# EAGLE board bateria (EAGLE 9.6.2)
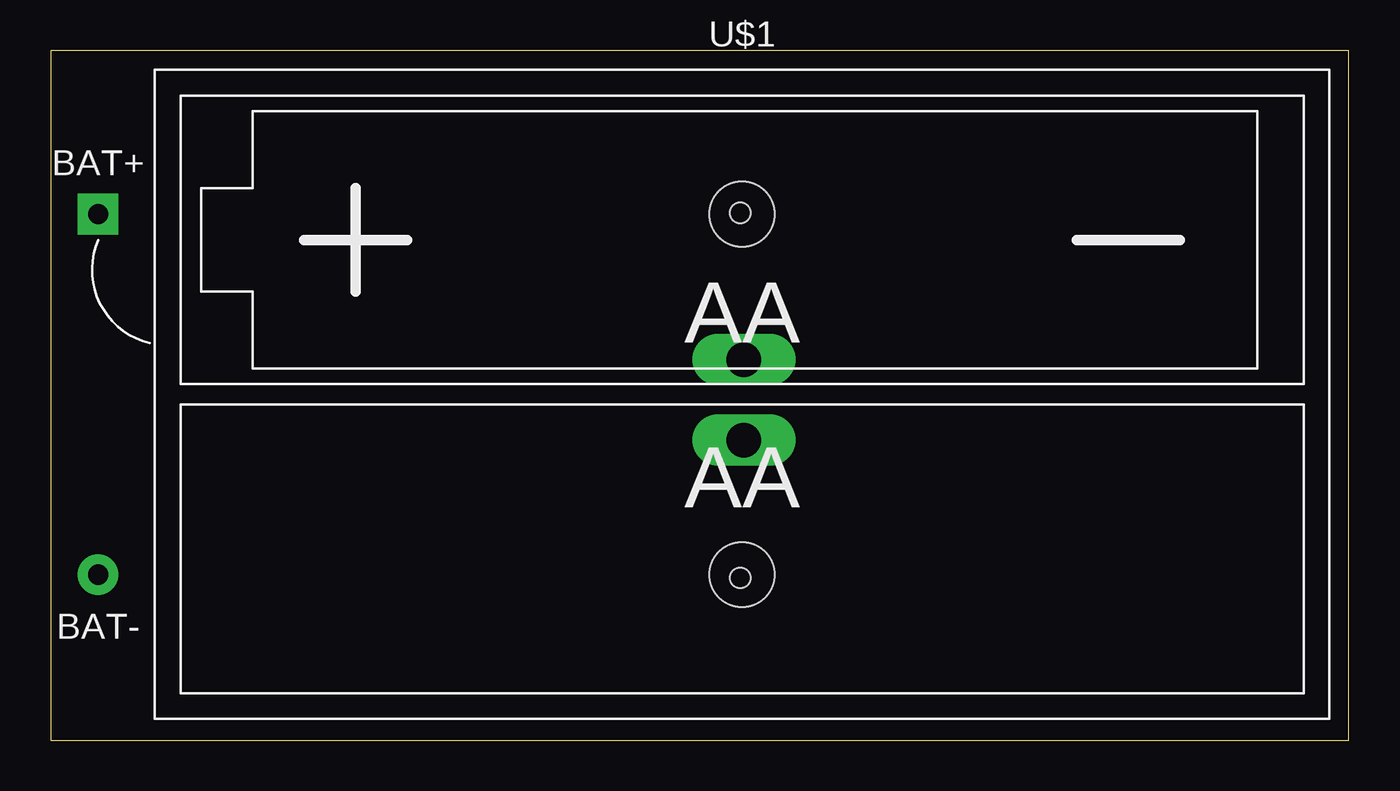
[diagram p0: board, top side]
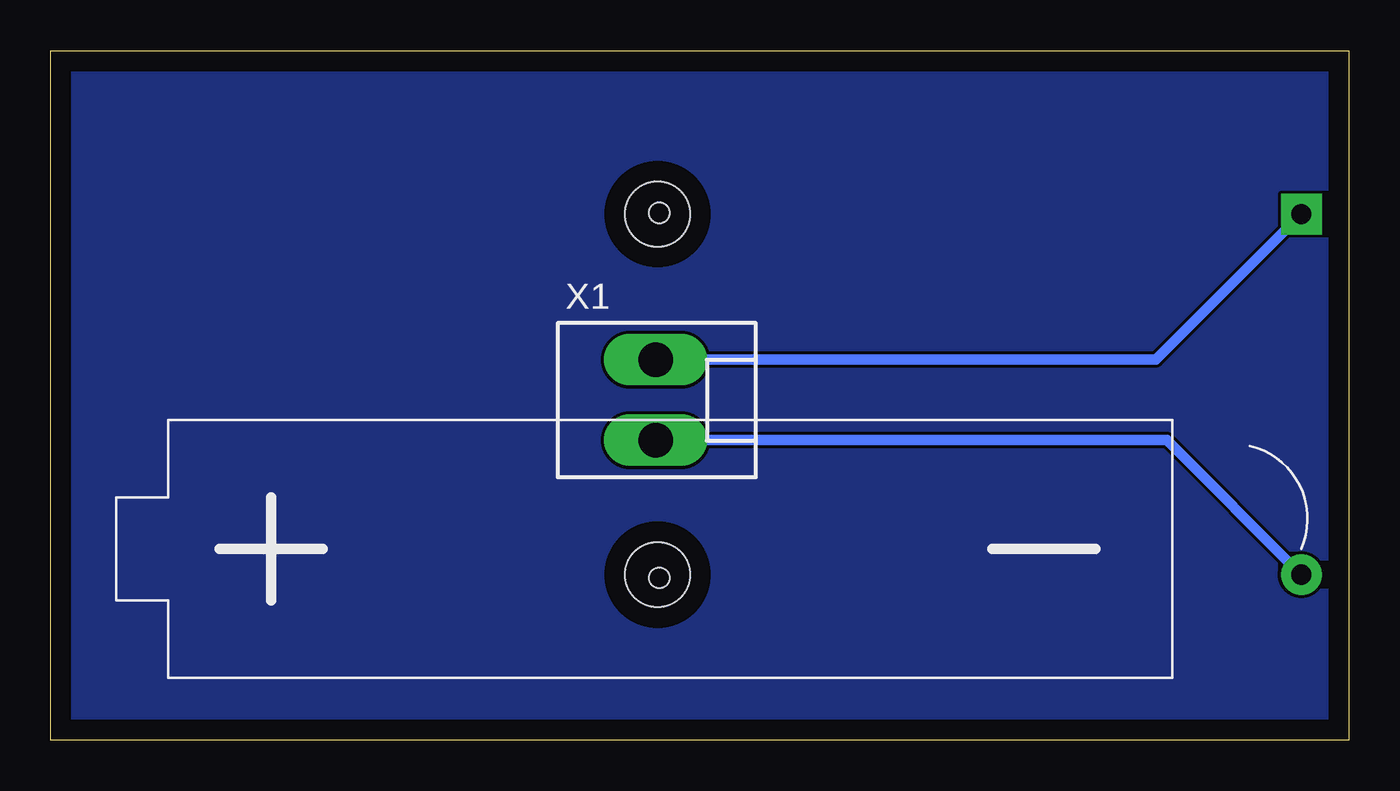
[diagram p1: board, bottom side, seen from below]

Size 64 x 34 mm. Coordinates in mm from the lower left corner, seen from the top.
Outline: 0,0 64,0 64,34 0,34 0,0
Copper layers (1*16): Top 0.035mm / dielectric 1.5mm / Bottom 0.035mm
Design rules "default": minimum track width 6mil, minimum drill 0.35mm, track to track 6mil, track to pad 6mil, pad to pad 6mil, via to via 6mil, smd to smd 6mil, copper to edge 40mil, drill to drill 6mil, minimum pad ring 10mil, minimum via ring 8mil, stop-mask expansion 4mil, vias tented up to drill 0mil, thermal gap 10mil
Holes 1 mm at 34,26 34,8

## Footprints (pad centres in the part's own frame; a part is rotated, then mirrored left to right if it is on the bottom)
BATTERY-HOLDER-2AA = drill 1 pad 2 square: BAT+ -31.75,8.89 | drill 1 pad 2: BAT- -31.75,-8.89 | hole 3.2: 0,8.89; 0,-8.89
KK-156-2 = drill 1.7 pad 2.184 long: 1 -1.98,0; 2 1.98,0

## Placement (x,y rotation side)
U$1  BATTERY-HOLDER-2AA  [BATTERY-HOLDER-2AA]  34.09,17.05 0 top
X1  [KK-156-2]  34.18,16.78 270 bottom

## Library data of the parts
U$1 = diy-modules
X1 = con-molex; MF: MOLEX; OC_FARNELL: unknown; OC_NEWARK: unknown

## Nets
N$1: U$1.BAT+ X1.1
N$2: U$1.BAT- X1.2

## Tracks (layer width: path | path; a pad name or v marks a point on that pad's centre or on a via)
GND
  pour Bottom: 0,34 64,34 64,0 0,0
N$1
  Bottom 0.508: U$1.BAT+ 9.52,18.76 X1.1
N$2
  Bottom 0.508: U$1.BAT- 8.98,14.8 X1.2